# EAGLE board DS1077_breakout-Panel-v10 (EAGLE 6.5.0)
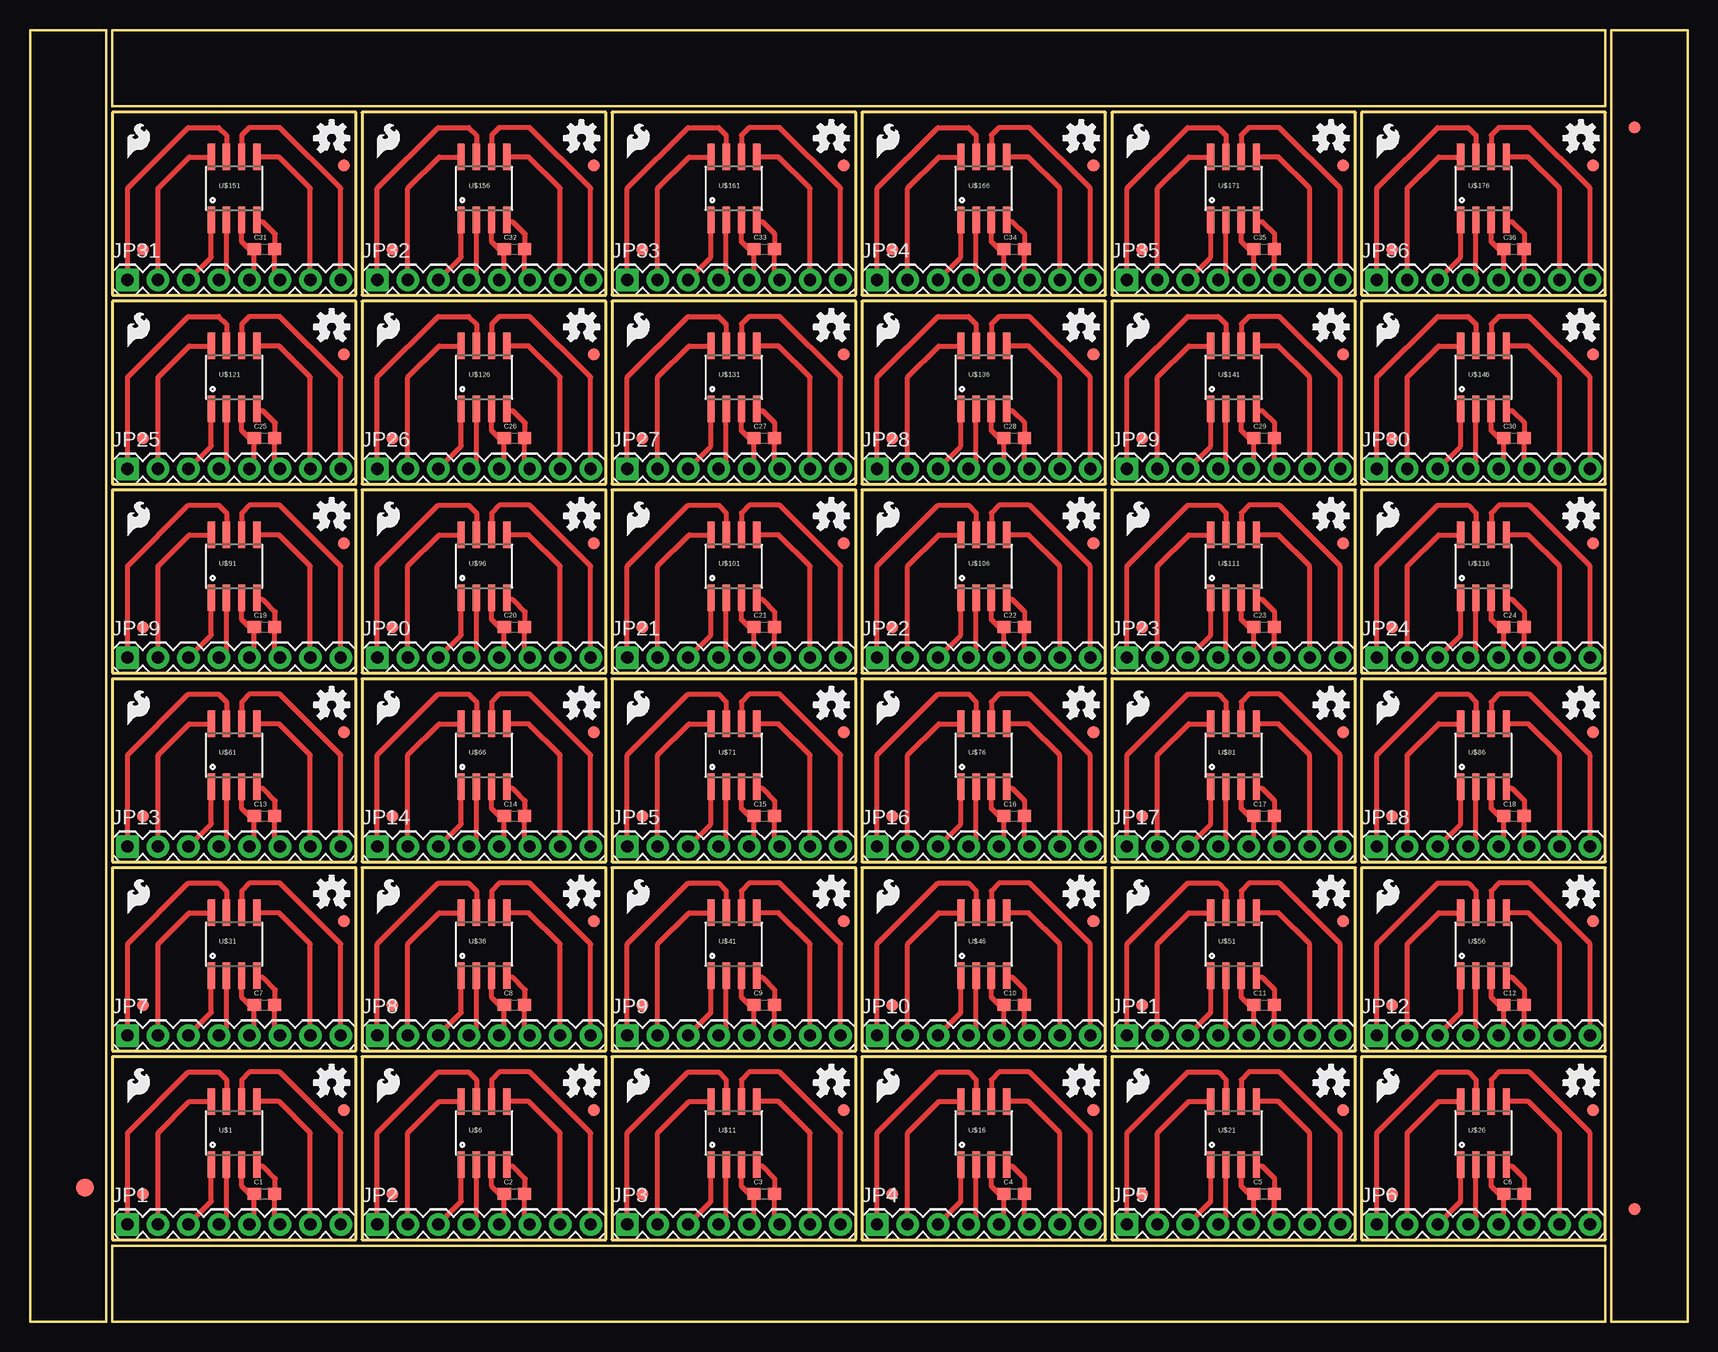
[diagram p0: board, top side]
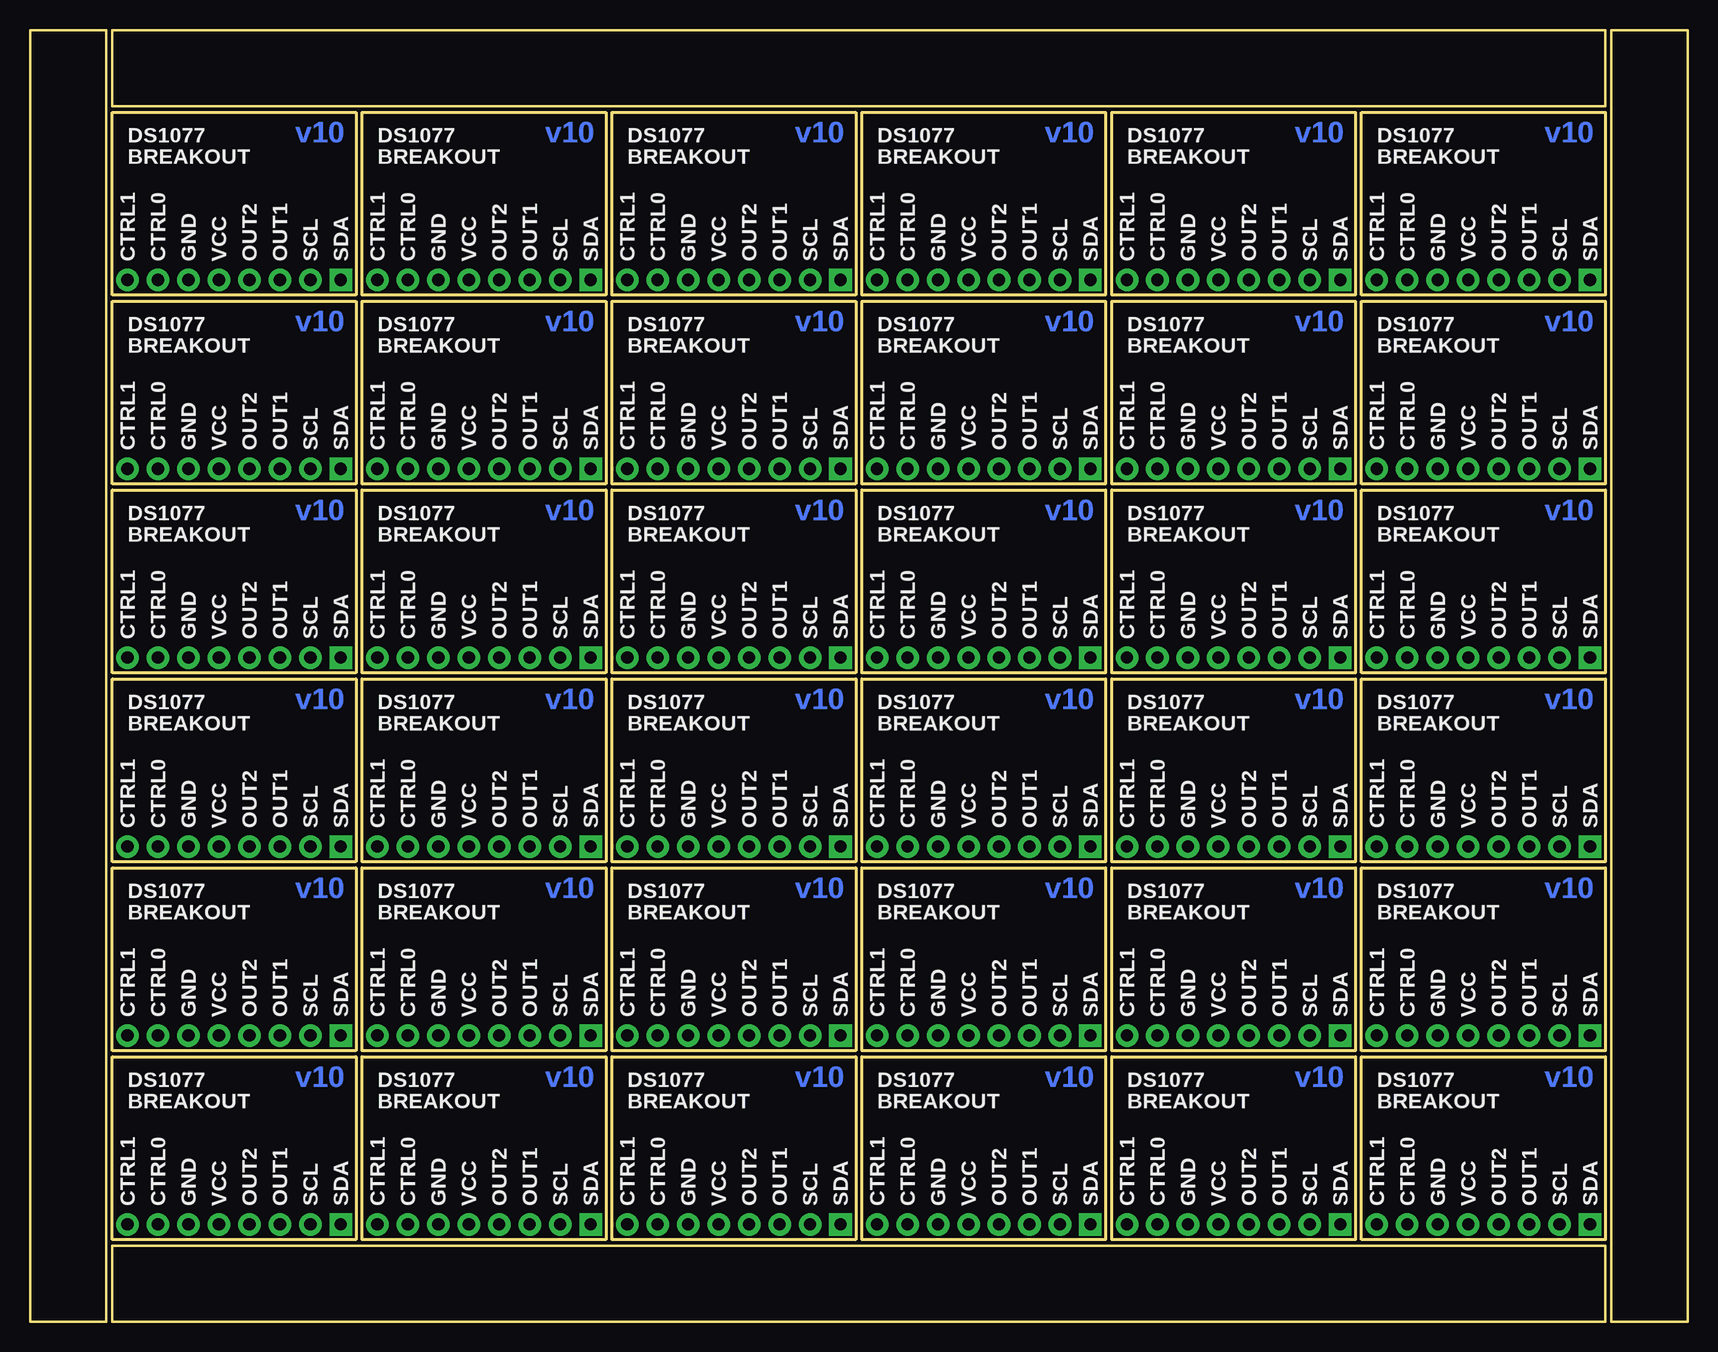
[diagram p1: board, bottom side, seen from below]

Size 138.18 x 107.7 mm. Coordinates in mm from the lower left corner, seen from the top.
Outline: 6.35,79.25 6.35,0 0,0 0,29.72
Outline: 138.18,79.25 138.18,0 131.83,0 131.83,29.72
Outline: 131.83,28.45 131.83,107.7 138.18,107.7 138.18,77.98
Outline: 0,28.45 0,107.7 6.35,107.7 6.35,77.98
Outline: 6.86,6.86 27.18,6.86 27.18,22.1 6.86,22.1 6.86,6.86
Outline: 27.69,6.86 48.01,6.86 48.01,22.1 27.69,22.1 27.69,6.86
Outline: 48.51,6.86 68.83,6.86 68.83,22.1 48.51,22.1 48.51,6.86
Outline: 69.34,6.86 89.66,6.86 89.66,22.1 69.34,22.1 69.34,6.86
Outline: 90.17,6.86 110.49,6.86 110.49,22.1 90.17,22.1 90.17,6.86
Outline: 111,6.86 131.32,6.86 131.32,22.1 111,22.1 111,6.86
Outline: 6.86,22.61 27.18,22.61 27.18,37.85 6.86,37.85 6.86,22.61
Outline: 27.69,22.61 48.01,22.61 48.01,37.85 27.69,37.85 27.69,22.61
Outline: 48.51,22.61 68.83,22.61 68.83,37.85 48.51,37.85 48.51,22.61
Outline: 69.34,22.61 89.66,22.61 89.66,37.85 69.34,37.85 69.34,22.61
Outline: 90.17,22.61 110.49,22.61 110.49,37.85 90.17,37.85 90.17,22.61
Outline: 111,22.61 131.32,22.61 131.32,37.85 111,37.85 111,22.61
Outline: 6.86,38.35 27.18,38.35 27.18,53.59 6.86,53.59 6.86,38.35
Outline: 27.69,38.35 48.01,38.35 48.01,53.59 27.69,53.59 27.69,38.35
Outline: 48.51,38.35 68.83,38.35 68.83,53.59 48.51,53.59 48.51,38.35
Outline: 69.34,38.35 89.66,38.35 89.66,53.59 69.34,53.59 69.34,38.35
Outline: 90.17,38.35 110.49,38.35 110.49,53.59 90.17,53.59 90.17,38.35
Outline: 111,38.35 131.32,38.35 131.32,53.59 111,53.59 111,38.35
Outline: 6.86,54.1 27.18,54.1 27.18,69.34 6.86,69.34 6.86,54.1
Outline: 27.69,54.1 48.01,54.1 48.01,69.34 27.69,69.34 27.69,54.1
Outline: 48.51,54.1 68.83,54.1 68.83,69.34 48.51,69.34 48.51,54.1
Outline: 69.34,54.1 89.66,54.1 89.66,69.34 69.34,69.34 69.34,54.1
Outline: 90.17,54.1 110.49,54.1 110.49,69.34 90.17,69.34 90.17,54.1
Outline: 111,54.1 131.32,54.1 131.32,69.34 111,69.34 111,54.1
Outline: 6.86,69.85 27.18,69.85 27.18,85.09 6.86,85.09 6.86,69.85
Outline: 27.69,69.85 48.01,69.85 48.01,85.09 27.69,85.09 27.69,69.85
Outline: 48.51,69.85 68.83,69.85 68.83,85.09 48.51,85.09 48.51,69.85
Outline: 69.34,69.85 89.66,69.85 89.66,85.09 69.34,85.09 69.34,69.85
Outline: 90.17,69.85 110.49,69.85 110.49,85.09 90.17,85.09 90.17,69.85
Outline: 111,69.85 131.32,69.85 131.32,85.09 111,85.09 111,69.85
Outline: 6.86,85.6 27.18,85.6 27.18,100.84 6.86,100.84 6.86,85.6
Outline: 27.69,85.6 48.01,85.6 48.01,100.84 27.69,100.84 27.69,85.6
Outline: 48.51,85.6 68.83,85.6 68.83,100.84 48.51,100.84 48.51,85.6
Outline: 69.34,85.6 89.66,85.6 89.66,100.84 69.34,100.84 69.34,85.6
Outline: 90.17,85.6 110.49,85.6 110.49,100.84 90.17,100.84 90.17,85.6
Outline: 111,85.6 131.32,85.6 131.32,100.84 111,100.84 111,85.6
Outline: 6.86,0 131.32,0 131.32,6.35 6.86,6.35 6.86,0
Outline: 131.32,107.7 6.86,107.7 6.86,101.35 131.32,101.35 131.32,107.7
Copper layers (1*16): Top 0.035mm / dielectric 1.5mm / Bottom 0.035mm
Design rules "SparkFun": minimum track width 8mil, minimum drill 20mil, track to track 8mil, track to pad 8mil, pad to pad 8mil, via to via 8mil, smd to smd 8mil, copper to edge 10mil, drill to drill 8mil, minimum pad ring 12mil, minimum via ring 10mil, stop-mask expansion 4mil, vias tented up to drill 25mil, thermal gap 10mil

## Footprints (pad centres in the part's own frame; a part is rotated, then mirrored left to right if it is on the bottom)
0603 = smd 1.1 x 1: 1 -0.85,0; 2 0.85,0
FIDUCIAL-1.5X3 = smd 1.5 x 1.5: 1 0,0
FIDUCIAL-1X2 = smd 1 x 1: 1 0,0
1X08 = drill 1.016 pad 1.88 square: 1 0,0 | drill 1.016 pad 1.88: 2 2.54,0; 3 5.08,0; 4 7.62,0; 5 10.16,0; 6 12.7,0; 7 15.24,0; 8 17.78,0
SO08 = smd 0.61 x 2.21: 1 -1.905,-2.616; 2 -0.635,-2.616; 3 0.635,-2.616; 4 1.905,-2.616; 5 1.905,2.616; 6 0.635,2.616; 7 -0.635,2.616; 8 -1.905,2.616

## Placement (x,y rotation side)
C1  .1uF  [0603]  19.56,10.67 0 top
C2  .1uF  [0603]  40.39,10.67 0 top
C3  .1uF  [0603]  61.21,10.67 0 top
C4  .1uF  [0603]  82.04,10.67 0 top
C5  .1uF  [0603]  102.87,10.67 0 top
C6  .1uF  [0603]  123.7,10.67 0 top
C7  .1uF  [0603]  19.56,26.42 0 top
C8  .1uF  [0603]  40.39,26.42 0 top
C9  .1uF  [0603]  61.21,26.42 0 top
C10  .1uF  [0603]  82.04,26.42 0 top
C11  .1uF  [0603]  102.87,26.42 0 top
C12  .1uF  [0603]  123.7,26.42 0 top
C13  .1uF  [0603]  19.56,42.16 0 top
C14  .1uF  [0603]  40.39,42.16 0 top
C15  .1uF  [0603]  61.21,42.16 0 top
C16  .1uF  [0603]  82.04,42.16 0 top
C17  .1uF  [0603]  102.87,42.16 0 top
C18  .1uF  [0603]  123.7,42.16 0 top
C19  .1uF  [0603]  19.56,57.91 0 top
C20  .1uF  [0603]  40.39,57.91 0 top
C21  .1uF  [0603]  61.21,57.91 0 top
C22  .1uF  [0603]  82.04,57.91 0 top
C23  .1uF  [0603]  102.87,57.91 0 top
C24  .1uF  [0603]  123.7,57.91 0 top
C25  .1uF  [0603]  19.56,73.66 0 top
C26  .1uF  [0603]  40.39,73.66 0 top
C27  .1uF  [0603]  61.21,73.66 0 top
C28  .1uF  [0603]  82.04,73.66 0 top
C29  .1uF  [0603]  102.87,73.66 0 top
C30  .1uF  [0603]  123.7,73.66 0 top
C31  .1uF  [0603]  19.56,89.41 0 top
C32  .1uF  [0603]  40.39,89.41 0 top
C33  .1uF  [0603]  61.21,89.41 0 top
C34  .1uF  [0603]  82.04,89.41 0 top
C35  .1uF  [0603]  102.87,89.41 0 top
C36  .1uF  [0603]  123.7,89.41 0 top
E$1  [FIDUCIAL-1.5X3]  4.57,11.18 0 top
E$4  [FIDUCIAL-1X2]  133.73,9.4 0 top
E$5  [FIDUCIAL-1X2]  133.73,99.57 180 top
JP1  [1X08]  8.13,8.13 0 top
JP2  [1X08]  28.96,8.13 0 top
JP3  [1X08]  49.78,8.13 0 top
JP4  [1X08]  70.61,8.13 0 top
JP5  [1X08]  91.44,8.13 0 top
JP6  [1X08]  112.27,8.13 0 top
JP7  [1X08]  8.13,23.88 0 top
JP8  [1X08]  28.96,23.88 0 top
JP9  [1X08]  49.78,23.88 0 top
JP10  [1X08]  70.61,23.88 0 top
JP11  [1X08]  91.44,23.88 0 top
JP12  [1X08]  112.27,23.88 0 top
JP13  [1X08]  8.13,39.62 0 top
JP14  [1X08]  28.96,39.62 0 top
JP15  [1X08]  49.78,39.62 0 top
JP16  [1X08]  70.61,39.62 0 top
JP17  [1X08]  91.44,39.62 0 top
JP18  [1X08]  112.27,39.62 0 top
JP19  [1X08]  8.13,55.37 0 top
JP20  [1X08]  28.96,55.37 0 top
JP21  [1X08]  49.78,55.37 0 top
JP22  [1X08]  70.61,55.37 0 top
JP23  [1X08]  91.44,55.37 0 top
JP24  [1X08]  112.27,55.37 0 top
JP25  [1X08]  8.13,71.12 0 top
JP26  [1X08]  28.96,71.12 0 top
JP27  [1X08]  49.78,71.12 0 top
JP28  [1X08]  70.61,71.12 0 top
JP29  [1X08]  91.44,71.12 0 top
JP30  [1X08]  112.27,71.12 0 top
JP31  [1X08]  8.13,86.87 0 top
JP32  [1X08]  28.96,86.87 0 top
JP33  [1X08]  49.78,86.87 0 top
JP34  [1X08]  70.61,86.87 0 top
JP35  [1X08]  91.44,86.87 0 top
JP36  [1X08]  112.27,86.87 0 top
U$1  DS1077  [SO08]  17.02,15.75 0 top
U$2  LOGO-SFESK  [SFE-LOGO-FLAME]  8.13,18.29 0 top
U$3  FIDUCIAL1X2  [FIDUCIAL-1X2]  26.16,17.65 0 top
U$4  FIDUCIAL1X2  [FIDUCIAL-1X2]  9.4,10.67 0 top
U$5  [OSHW-LOGO-S]  25.15,19.94 0 top
U$6  DS1077  [SO08]  37.85,15.75 0 top
U$7  LOGO-SFESK  [SFE-LOGO-FLAME]  28.96,18.29 0 top
U$8  FIDUCIAL1X2  [FIDUCIAL-1X2]  46.99,17.65 0 top
U$9  FIDUCIAL1X2  [FIDUCIAL-1X2]  30.23,10.67 0 top
U$10  [OSHW-LOGO-S]  45.97,19.94 0 top
U$11  DS1077  [SO08]  58.67,15.75 0 top
U$12  LOGO-SFESK  [SFE-LOGO-FLAME]  49.78,18.29 0 top
U$13  FIDUCIAL1X2  [FIDUCIAL-1X2]  67.82,17.65 0 top
U$14  FIDUCIAL1X2  [FIDUCIAL-1X2]  51.05,10.67 0 top
U$15  [OSHW-LOGO-S]  66.8,19.94 0 top
U$16  DS1077  [SO08]  79.5,15.75 0 top
U$17  LOGO-SFESK  [SFE-LOGO-FLAME]  70.61,18.29 0 top
U$18  FIDUCIAL1X2  [FIDUCIAL-1X2]  88.65,17.65 0 top
U$19  FIDUCIAL1X2  [FIDUCIAL-1X2]  71.88,10.67 0 top
U$20  [OSHW-LOGO-S]  87.63,19.94 0 top
U$21  DS1077  [SO08]  100.33,15.75 0 top
U$22  LOGO-SFESK  [SFE-LOGO-FLAME]  91.44,18.29 0 top
U$23  FIDUCIAL1X2  [FIDUCIAL-1X2]  109.47,17.65 0 top
U$24  FIDUCIAL1X2  [FIDUCIAL-1X2]  92.71,10.67 0 top
U$25  [OSHW-LOGO-S]  108.46,19.94 0 top
U$26  DS1077  [SO08]  121.16,15.75 0 top
U$27  LOGO-SFESK  [SFE-LOGO-FLAME]  112.27,18.29 0 top
U$28  FIDUCIAL1X2  [FIDUCIAL-1X2]  130.3,17.65 0 top
U$29  FIDUCIAL1X2  [FIDUCIAL-1X2]  113.54,10.67 0 top
U$30  [OSHW-LOGO-S]  129.29,19.94 0 top
U$31  DS1077  [SO08]  17.02,31.5 0 top
U$32  LOGO-SFESK  [SFE-LOGO-FLAME]  8.13,34.04 0 top
U$33  FIDUCIAL1X2  [FIDUCIAL-1X2]  26.16,33.4 0 top
U$34  FIDUCIAL1X2  [FIDUCIAL-1X2]  9.4,26.42 0 top
U$35  [OSHW-LOGO-S]  25.15,35.69 0 top
U$36  DS1077  [SO08]  37.85,31.5 0 top
U$37  LOGO-SFESK  [SFE-LOGO-FLAME]  28.96,34.04 0 top
U$38  FIDUCIAL1X2  [FIDUCIAL-1X2]  46.99,33.4 0 top
U$39  FIDUCIAL1X2  [FIDUCIAL-1X2]  30.23,26.42 0 top
U$40  [OSHW-LOGO-S]  45.97,35.69 0 top
U$41  DS1077  [SO08]  58.67,31.5 0 top
U$42  LOGO-SFESK  [SFE-LOGO-FLAME]  49.78,34.04 0 top
U$43  FIDUCIAL1X2  [FIDUCIAL-1X2]  67.82,33.4 0 top
U$44  FIDUCIAL1X2  [FIDUCIAL-1X2]  51.05,26.42 0 top
U$45  [OSHW-LOGO-S]  66.8,35.69 0 top
U$46  DS1077  [SO08]  79.5,31.5 0 top
U$47  LOGO-SFESK  [SFE-LOGO-FLAME]  70.61,34.04 0 top
U$48  FIDUCIAL1X2  [FIDUCIAL-1X2]  88.65,33.4 0 top
U$49  FIDUCIAL1X2  [FIDUCIAL-1X2]  71.88,26.42 0 top
U$50  [OSHW-LOGO-S]  87.63,35.69 0 top
U$51  DS1077  [SO08]  100.33,31.5 0 top
U$52  LOGO-SFESK  [SFE-LOGO-FLAME]  91.44,34.04 0 top
U$53  FIDUCIAL1X2  [FIDUCIAL-1X2]  109.47,33.4 0 top
U$54  FIDUCIAL1X2  [FIDUCIAL-1X2]  92.71,26.42 0 top
U$55  [OSHW-LOGO-S]  108.46,35.69 0 top
U$56  DS1077  [SO08]  121.16,31.5 0 top
U$57  LOGO-SFESK  [SFE-LOGO-FLAME]  112.27,34.04 0 top
U$58  FIDUCIAL1X2  [FIDUCIAL-1X2]  130.3,33.4 0 top
U$59  FIDUCIAL1X2  [FIDUCIAL-1X2]  113.54,26.42 0 top
U$60  [OSHW-LOGO-S]  129.29,35.69 0 top
U$61  DS1077  [SO08]  17.02,47.24 0 top
U$62  LOGO-SFESK  [SFE-LOGO-FLAME]  8.13,49.78 0 top
U$63  FIDUCIAL1X2  [FIDUCIAL-1X2]  26.16,49.15 0 top
U$64  FIDUCIAL1X2  [FIDUCIAL-1X2]  9.4,42.16 0 top
U$65  [OSHW-LOGO-S]  25.15,51.44 0 top
U$66  DS1077  [SO08]  37.85,47.24 0 top
U$67  LOGO-SFESK  [SFE-LOGO-FLAME]  28.96,49.78 0 top
U$68  FIDUCIAL1X2  [FIDUCIAL-1X2]  46.99,49.15 0 top
U$69  FIDUCIAL1X2  [FIDUCIAL-1X2]  30.23,42.16 0 top
U$70  [OSHW-LOGO-S]  45.97,51.44 0 top
U$71  DS1077  [SO08]  58.67,47.24 0 top
U$72  LOGO-SFESK  [SFE-LOGO-FLAME]  49.78,49.78 0 top
U$73  FIDUCIAL1X2  [FIDUCIAL-1X2]  67.82,49.15 0 top
U$74  FIDUCIAL1X2  [FIDUCIAL-1X2]  51.05,42.16 0 top
U$75  [OSHW-LOGO-S]  66.8,51.44 0 top
U$76  DS1077  [SO08]  79.5,47.24 0 top
U$77  LOGO-SFESK  [SFE-LOGO-FLAME]  70.61,49.78 0 top
U$78  FIDUCIAL1X2  [FIDUCIAL-1X2]  88.65,49.15 0 top
U$79  FIDUCIAL1X2  [FIDUCIAL-1X2]  71.88,42.16 0 top
U$80  [OSHW-LOGO-S]  87.63,51.44 0 top
U$81  DS1077  [SO08]  100.33,47.24 0 top
U$82  LOGO-SFESK  [SFE-LOGO-FLAME]  91.44,49.78 0 top
U$83  FIDUCIAL1X2  [FIDUCIAL-1X2]  109.47,49.15 0 top
U$84  FIDUCIAL1X2  [FIDUCIAL-1X2]  92.71,42.16 0 top
U$85  [OSHW-LOGO-S]  108.46,51.44 0 top
U$86  DS1077  [SO08]  121.16,47.24 0 top
U$87  LOGO-SFESK  [SFE-LOGO-FLAME]  112.27,49.78 0 top
U$88  FIDUCIAL1X2  [FIDUCIAL-1X2]  130.3,49.15 0 top
U$89  FIDUCIAL1X2  [FIDUCIAL-1X2]  113.54,42.16 0 top
U$90  [OSHW-LOGO-S]  129.29,51.44 0 top
U$91  DS1077  [SO08]  17.02,62.99 0 top
U$92  LOGO-SFESK  [SFE-LOGO-FLAME]  8.13,65.53 0 top
U$93  FIDUCIAL1X2  [FIDUCIAL-1X2]  26.16,64.9 0 top
U$94  FIDUCIAL1X2  [FIDUCIAL-1X2]  9.4,57.91 0 top
U$95  [OSHW-LOGO-S]  25.15,67.18 0 top
U$96  DS1077  [SO08]  37.85,62.99 0 top
U$97  LOGO-SFESK  [SFE-LOGO-FLAME]  28.96,65.53 0 top
U$98  FIDUCIAL1X2  [FIDUCIAL-1X2]  46.99,64.9 0 top
U$99  FIDUCIAL1X2  [FIDUCIAL-1X2]  30.23,57.91 0 top
U$100  [OSHW-LOGO-S]  45.97,67.18 0 top
U$101  DS1077  [SO08]  58.67,62.99 0 top
U$102  LOGO-SFESK  [SFE-LOGO-FLAME]  49.78,65.53 0 top
U$103  FIDUCIAL1X2  [FIDUCIAL-1X2]  67.82,64.9 0 top
U$104  FIDUCIAL1X2  [FIDUCIAL-1X2]  51.05,57.91 0 top
U$105  [OSHW-LOGO-S]  66.8,67.18 0 top
U$106  DS1077  [SO08]  79.5,62.99 0 top
U$107  LOGO-SFESK  [SFE-LOGO-FLAME]  70.61,65.53 0 top
U$108  FIDUCIAL1X2  [FIDUCIAL-1X2]  88.65,64.9 0 top
U$109  FIDUCIAL1X2  [FIDUCIAL-1X2]  71.88,57.91 0 top
U$110  [OSHW-LOGO-S]  87.63,67.18 0 top
U$111  DS1077  [SO08]  100.33,62.99 0 top
U$112  LOGO-SFESK  [SFE-LOGO-FLAME]  91.44,65.53 0 top
U$113  FIDUCIAL1X2  [FIDUCIAL-1X2]  109.47,64.9 0 top
U$114  FIDUCIAL1X2  [FIDUCIAL-1X2]  92.71,57.91 0 top
U$115  [OSHW-LOGO-S]  108.46,67.18 0 top
U$116  DS1077  [SO08]  121.16,62.99 0 top
U$117  LOGO-SFESK  [SFE-LOGO-FLAME]  112.27,65.53 0 top
U$118  FIDUCIAL1X2  [FIDUCIAL-1X2]  130.3,64.9 0 top
U$119  FIDUCIAL1X2  [FIDUCIAL-1X2]  113.54,57.91 0 top
U$120  [OSHW-LOGO-S]  129.29,67.18 0 top
U$121  DS1077  [SO08]  17.02,78.74 0 top
U$122  LOGO-SFESK  [SFE-LOGO-FLAME]  8.13,81.28 0 top
U$123  FIDUCIAL1X2  [FIDUCIAL-1X2]  26.16,80.64 0 top
U$124  FIDUCIAL1X2  [FIDUCIAL-1X2]  9.4,73.66 0 top
U$125  [OSHW-LOGO-S]  25.15,82.93 0 top
U$126  DS1077  [SO08]  37.85,78.74 0 top
U$127  LOGO-SFESK  [SFE-LOGO-FLAME]  28.96,81.28 0 top
U$128  FIDUCIAL1X2  [FIDUCIAL-1X2]  46.99,80.64 0 top
U$129  FIDUCIAL1X2  [FIDUCIAL-1X2]  30.23,73.66 0 top
U$130  [OSHW-LOGO-S]  45.97,82.93 0 top
U$131  DS1077  [SO08]  58.67,78.74 0 top
U$132  LOGO-SFESK  [SFE-LOGO-FLAME]  49.78,81.28 0 top
U$133  FIDUCIAL1X2  [FIDUCIAL-1X2]  67.82,80.64 0 top
U$134  FIDUCIAL1X2  [FIDUCIAL-1X2]  51.05,73.66 0 top
U$135  [OSHW-LOGO-S]  66.8,82.93 0 top
U$136  DS1077  [SO08]  79.5,78.74 0 top
U$137  LOGO-SFESK  [SFE-LOGO-FLAME]  70.61,81.28 0 top
U$138  FIDUCIAL1X2  [FIDUCIAL-1X2]  88.65,80.64 0 top
U$139  FIDUCIAL1X2  [FIDUCIAL-1X2]  71.88,73.66 0 top
U$140  [OSHW-LOGO-S]  87.63,82.93 0 top
U$141  DS1077  [SO08]  100.33,78.74 0 top
U$142  LOGO-SFESK  [SFE-LOGO-FLAME]  91.44,81.28 0 top
U$143  FIDUCIAL1X2  [FIDUCIAL-1X2]  109.47,80.64 0 top
U$144  FIDUCIAL1X2  [FIDUCIAL-1X2]  92.71,73.66 0 top
U$145  [OSHW-LOGO-S]  108.46,82.93 0 top
U$146  DS1077  [SO08]  121.16,78.74 0 top
U$147  LOGO-SFESK  [SFE-LOGO-FLAME]  112.27,81.28 0 top
U$148  FIDUCIAL1X2  [FIDUCIAL-1X2]  130.3,80.64 0 top
U$149  FIDUCIAL1X2  [FIDUCIAL-1X2]  113.54,73.66 0 top
U$150  [OSHW-LOGO-S]  129.29,82.93 0 top
U$151  DS1077  [SO08]  17.02,94.49 0 top
U$152  LOGO-SFESK  [SFE-LOGO-FLAME]  8.13,97.03 0 top
U$153  FIDUCIAL1X2  [FIDUCIAL-1X2]  26.16,96.39 0 top
U$154  FIDUCIAL1X2  [FIDUCIAL-1X2]  9.4,89.41 0 top
U$155  [OSHW-LOGO-S]  25.15,98.68 0 top
U$156  DS1077  [SO08]  37.85,94.49 0 top
U$157  LOGO-SFESK  [SFE-LOGO-FLAME]  28.96,97.03 0 top
U$158  FIDUCIAL1X2  [FIDUCIAL-1X2]  46.99,96.39 0 top
U$159  FIDUCIAL1X2  [FIDUCIAL-1X2]  30.23,89.41 0 top
U$160  [OSHW-LOGO-S]  45.97,98.68 0 top
U$161  DS1077  [SO08]  58.67,94.49 0 top
U$162  LOGO-SFESK  [SFE-LOGO-FLAME]  49.78,97.03 0 top
U$163  FIDUCIAL1X2  [FIDUCIAL-1X2]  67.82,96.39 0 top
U$164  FIDUCIAL1X2  [FIDUCIAL-1X2]  51.05,89.41 0 top
U$165  [OSHW-LOGO-S]  66.8,98.68 0 top
U$166  DS1077  [SO08]  79.5,94.49 0 top
U$167  LOGO-SFESK  [SFE-LOGO-FLAME]  70.61,97.03 0 top
U$168  FIDUCIAL1X2  [FIDUCIAL-1X2]  88.65,96.39 0 top
U$169  FIDUCIAL1X2  [FIDUCIAL-1X2]  71.88,89.41 0 top
U$170  [OSHW-LOGO-S]  87.63,98.68 0 top
U$171  DS1077  [SO08]  100.33,94.49 0 top
U$172  LOGO-SFESK  [SFE-LOGO-FLAME]  91.44,97.03 0 top
U$173  FIDUCIAL1X2  [FIDUCIAL-1X2]  109.47,96.39 0 top
U$174  FIDUCIAL1X2  [FIDUCIAL-1X2]  92.71,89.41 0 top
U$175  [OSHW-LOGO-S]  108.46,98.68 0 top
U$176  DS1077  [SO08]  121.16,94.49 0 top
U$177  LOGO-SFESK  [SFE-LOGO-FLAME]  112.27,97.03 0 top
U$178  FIDUCIAL1X2  [FIDUCIAL-1X2]  130.3,96.39 0 top
U$179  FIDUCIAL1X2  [FIDUCIAL-1X2]  113.54,89.41 0 top
U$180  [OSHW-LOGO-S]  129.29,98.68 0 top

## Library data of the parts
C1-C36 U$1-U$4 U$6-U$9 U$11-U$14 U$16-U$19 U$21-U$24 U$26-U$29 U$31-U$34 U$36-U$39 U$41-U$44 U$46-U$49 U$51-U$54 U$56-U$59 U$61-U$64 U$66-U$69 U$71-U$74 U$76-U$79 U$81-U$84 U$86-U$89 U$91-U$94 U$96-U$99 U$101-U$104 U$106-U$109 U$111-U$114 U$116-U$119 U$121-U$124 U$126-U$129 U$131-U$134 U$136-U$139 U$141-U$144 U$146-U$149 U$151-U$154 U$156-U$159 U$161-U$164 U$166-U$169 U$171-U$174 U$176-U$179 = SparkFun
E$1 E$4 E$5 U$5 U$10 U$15 U$20 U$25 U$30 U$35 U$40 U$45 U$50 U$55 U$60 U$65 U$70 U$75 U$80 U$85 U$90 U$95 U$100 U$105 U$110 U$115 U$120 U$125 U$130 U$135 U$140 U$145 U$150 U$155 U$160 U$165 U$170 U$175 U$180 = SparkFun-Aesthetics
JP1-JP36 = SparkFun-Connectors

## Nets
CTRL0: JP1.7 U$1.5
CTRL1: JP1.8 U$1.6
CTRL2: JP2.7 U$6.5
CTRL3: JP2.8 U$6.6
CTRL4: JP3.7 U$11.5
CTRL5: JP3.8 U$11.6
CTRL6: JP4.7 U$16.5
CTRL7: JP4.8 U$16.6
CTRL8: JP5.7 U$21.5
CTRL9: JP5.8 U$21.6
CTRL10: JP6.7 U$26.5
CTRL11: JP6.8 U$26.6
CTRL12: JP7.7 U$31.5
CTRL13: JP7.8 U$31.6
CTRL14: JP8.7 U$36.5
CTRL15: JP8.8 U$36.6
CTRL16: JP9.7 U$41.5
CTRL17: JP9.8 U$41.6
CTRL18: JP10.7 U$46.5
CTRL19: JP10.8 U$46.6
CTRL20: JP11.7 U$51.5
CTRL21: JP11.8 U$51.6
CTRL22: JP12.7 U$56.5
CTRL23: JP12.8 U$56.6
CTRL24: JP13.7 U$61.5
CTRL25: JP13.8 U$61.6
CTRL26: JP14.7 U$66.5
CTRL27: JP14.8 U$66.6
CTRL28: JP15.7 U$71.5
CTRL29: JP15.8 U$71.6
CTRL30: JP16.7 U$76.5
CTRL31: JP16.8 U$76.6
CTRL32: JP17.7 U$81.5
CTRL33: JP17.8 U$81.6
CTRL34: JP18.7 U$86.5
CTRL35: JP18.8 U$86.6
CTRL36: JP19.7 U$91.5
CTRL37: JP19.8 U$91.6
CTRL38: JP20.7 U$96.5
CTRL39: JP20.8 U$96.6
CTRL40: JP21.7 U$101.5
CTRL41: JP21.8 U$101.6
CTRL42: JP22.7 U$106.5
CTRL43: JP22.8 U$106.6
CTRL44: JP23.7 U$111.5
CTRL45: JP23.8 U$111.6
CTRL46: JP24.7 U$116.5
CTRL47: JP24.8 U$116.6
CTRL48: JP25.7 U$121.5
CTRL49: JP25.8 U$121.6
CTRL50: JP26.7 U$126.5
CTRL51: JP26.8 U$126.6
CTRL52: JP27.7 U$131.5
CTRL53: JP27.8 U$131.6
CTRL54: JP28.7 U$136.5
CTRL55: JP28.8 U$136.6
CTRL56: JP29.7 U$141.5
CTRL57: JP29.8 U$141.6
CTRL58: JP30.7 U$146.5
CTRL59: JP30.8 U$146.6
CTRL60: JP31.7 U$151.5
CTRL61: JP31.8 U$151.6
CTRL62: JP32.7 U$156.5
CTRL63: JP32.8 U$156.6
CTRL64: JP33.7 U$161.5
CTRL65: JP33.8 U$161.6
CTRL66: JP34.7 U$166.5
CTRL67: JP34.8 U$166.6
CTRL68: JP35.7 U$171.5
CTRL69: JP35.8 U$171.6
CTRL70: JP36.7 U$176.5
CTRL71: JP36.8 U$176.6
GND: C1.2 JP1.6 U$1.4
GND1: C2.2 JP2.6 U$6.4
GND2: C3.2 JP3.6 U$11.4
GND3: C4.2 JP4.6 U$16.4
GND4: C5.2 JP5.6 U$21.4
GND5: C6.2 JP6.6 U$26.4
GND6: C7.2 JP7.6 U$31.4
GND7: C8.2 JP8.6 U$36.4
GND8: C9.2 JP9.6 U$41.4
GND9: C10.2 JP10.6 U$46.4
GND10: C11.2 JP11.6 U$51.4
GND11: C12.2 JP12.6 U$56.4
GND12: C13.2 JP13.6 U$61.4
GND13: C14.2 JP14.6 U$66.4
GND14: C15.2 JP15.6 U$71.4
GND15: C16.2 JP16.6 U$76.4
GND16: C17.2 JP17.6 U$81.4
GND17: C18.2 JP18.6 U$86.4
GND18: C19.2 JP19.6 U$91.4
GND19: C20.2 JP20.6 U$96.4
GND20: C21.2 JP21.6 U$101.4
GND21: C22.2 JP22.6 U$106.4
GND22: C23.2 JP23.6 U$111.4
GND23: C24.2 JP24.6 U$116.4
GND24: C25.2 JP25.6 U$121.4
GND25: C26.2 JP26.6 U$126.4
GND26: C27.2 JP27.6 U$131.4
GND27: C28.2 JP28.6 U$136.4
GND28: C29.2 JP29.6 U$141.4
GND29: C30.2 JP30.6 U$146.4
GND30: C31.2 JP31.6 U$151.4
GND31: C32.2 JP32.6 U$156.4
GND32: C33.2 JP33.6 U$161.4
GND33: C34.2 JP34.6 U$166.4
GND34: C35.2 JP35.6 U$171.4
GND35: C36.2 JP36.6 U$176.4
OUT1: JP1.3 U$1.1
OUT2: JP1.4 U$1.2
OUT3: JP2.3 U$6.1
OUT4: JP2.4 U$6.2
OUT5: JP3.3 U$11.1
OUT6: JP3.4 U$11.2
OUT7: JP4.3 U$16.1
OUT8: JP4.4 U$16.2
OUT9: JP5.3 U$21.1
OUT10: JP5.4 U$21.2
OUT11: JP6.3 U$26.1
OUT12: JP6.4 U$26.2
OUT13: JP7.3 U$31.1
OUT14: JP7.4 U$31.2
OUT15: JP8.3 U$36.1
OUT16: JP8.4 U$36.2
OUT17: JP9.3 U$41.1
OUT18: JP9.4 U$41.2
OUT19: JP10.3 U$46.1
OUT20: JP10.4 U$46.2
OUT21: JP11.3 U$51.1
OUT22: JP11.4 U$51.2
OUT23: JP12.3 U$56.1
OUT24: JP12.4 U$56.2
OUT25: JP13.3 U$61.1
OUT26: JP13.4 U$61.2
OUT27: JP14.3 U$66.1
OUT28: JP14.4 U$66.2
OUT29: JP15.3 U$71.1
OUT30: JP15.4 U$71.2
OUT31: JP16.3 U$76.1
OUT32: JP16.4 U$76.2
OUT33: JP17.3 U$81.1
OUT34: JP17.4 U$81.2
OUT35: JP18.3 U$86.1
OUT36: JP18.4 U$86.2
OUT37: JP19.3 U$91.1
OUT38: JP19.4 U$91.2
OUT39: JP20.3 U$96.1
OUT40: JP20.4 U$96.2
OUT41: JP21.3 U$101.1
OUT42: JP21.4 U$101.2
OUT43: JP22.3 U$106.1
OUT44: JP22.4 U$106.2
OUT45: JP23.3 U$111.1
OUT46: JP23.4 U$111.2
OUT47: JP24.3 U$116.1
OUT48: JP24.4 U$116.2
OUT49: JP25.3 U$121.1
OUT50: JP25.4 U$121.2
OUT51: JP26.3 U$126.1
OUT52: JP26.4 U$126.2
OUT53: JP27.3 U$131.1
OUT54: JP27.4 U$131.2
OUT55: JP28.3 U$136.1
OUT56: JP28.4 U$136.2
OUT57: JP29.3 U$141.1
OUT58: JP29.4 U$141.2
OUT59: JP30.3 U$146.1
OUT60: JP30.4 U$146.2
OUT61: JP31.3 U$151.1
OUT62: JP31.4 U$151.2
OUT63: JP32.3 U$156.1
OUT64: JP32.4 U$156.2
OUT65: JP33.3 U$161.1
OUT66: JP33.4 U$161.2
OUT67: JP34.3 U$166.1
OUT68: JP34.4 U$166.2
OUT69: JP35.3 U$171.1
OUT70: JP35.4 U$171.2
OUT71: JP36.3 U$176.1
OUT72: JP36.4 U$176.2
SCL: JP1.2 U$1.8
SCL1: JP2.2 U$6.8
SCL2: JP3.2 U$11.8
SCL3: JP4.2 U$16.8
SCL4: JP5.2 U$21.8
SCL5: JP6.2 U$26.8
SCL6: JP7.2 U$31.8
SCL7: JP8.2 U$36.8
SCL8: JP9.2 U$41.8
SCL9: JP10.2 U$46.8
SCL10: JP11.2 U$51.8
SCL11: JP12.2 U$56.8
SCL12: JP13.2 U$61.8
SCL13: JP14.2 U$66.8
SCL14: JP15.2 U$71.8
SCL15: JP16.2 U$76.8
SCL16: JP17.2 U$81.8
SCL17: JP18.2 U$86.8
SCL18: JP19.2 U$91.8
SCL19: JP20.2 U$96.8
SCL20: JP21.2 U$101.8
SCL21: JP22.2 U$106.8
SCL22: JP23.2 U$111.8
SCL23: JP24.2 U$116.8
SCL24: JP25.2 U$121.8
SCL25: JP26.2 U$126.8
SCL26: JP27.2 U$131.8
SCL27: JP28.2 U$136.8
SCL28: JP29.2 U$141.8
SCL29: JP30.2 U$146.8
SCL30: JP31.2 U$151.8
SCL31: JP32.2 U$156.8
SCL32: JP33.2 U$161.8
SCL33: JP34.2 U$166.8
SCL34: JP35.2 U$171.8
SCL35: JP36.2 U$176.8
SDA: JP1.1 U$1.7
SDA1: JP2.1 U$6.7
SDA2: JP3.1 U$11.7
SDA3: JP4.1 U$16.7
SDA4: JP5.1 U$21.7
SDA5: JP6.1 U$26.7
SDA6: JP7.1 U$31.7
SDA7: JP8.1 U$36.7
SDA8: JP9.1 U$41.7
SDA9: JP10.1 U$46.7
SDA10: JP11.1 U$51.7
SDA11: JP12.1 U$56.7
SDA12: JP13.1 U$61.7
SDA13: JP14.1 U$66.7
SDA14: JP15.1 U$71.7
SDA15: JP16.1 U$76.7
SDA16: JP17.1 U$81.7
SDA17: JP18.1 U$86.7
SDA18: JP19.1 U$91.7
SDA19: JP20.1 U$96.7
SDA20: JP21.1 U$101.7
SDA21: JP22.1 U$106.7
SDA22: JP23.1 U$111.7
SDA23: JP24.1 U$116.7
SDA24: JP25.1 U$121.7
SDA25: JP26.1 U$126.7
SDA26: JP27.1 U$131.7
SDA27: JP28.1 U$136.7
SDA28: JP29.1 U$141.7
SDA29: JP30.1 U$146.7
SDA30: JP31.1 U$151.7
SDA31: JP32.1 U$156.7
SDA32: JP33.1 U$161.7
SDA33: JP34.1 U$166.7
SDA34: JP35.1 U$171.7
SDA35: JP36.1 U$176.7
VCC: C1.1 JP1.5 U$1.3
VCC1: C2.1 JP2.5 U$6.3
VCC2: C3.1 JP3.5 U$11.3
VCC3: C4.1 JP4.5 U$16.3
VCC4: C5.1 JP5.5 U$21.3
VCC5: C6.1 JP6.5 U$26.3
VCC6: C7.1 JP7.5 U$31.3
VCC7: C8.1 JP8.5 U$36.3
VCC8: C9.1 JP9.5 U$41.3
VCC9: C10.1 JP10.5 U$46.3
VCC10: C11.1 JP11.5 U$51.3
VCC11: C12.1 JP12.5 U$56.3
VCC12: C13.1 JP13.5 U$61.3
VCC13: C14.1 JP14.5 U$66.3
VCC14: C15.1 JP15.5 U$71.3
VCC15: C16.1 JP16.5 U$76.3
VCC16: C17.1 JP17.5 U$81.3
VCC17: C18.1 JP18.5 U$86.3
VCC18: C19.1 JP19.5 U$91.3
VCC19: C20.1 JP20.5 U$96.3
VCC20: C21.1 JP21.5 U$101.3
VCC21: C22.1 JP22.5 U$106.3
VCC22: C23.1 JP23.5 U$111.3
VCC23: C24.1 JP24.5 U$116.3
VCC24: C25.1 JP25.5 U$121.3
VCC25: C26.1 JP26.5 U$126.3
VCC26: C27.1 JP27.5 U$131.3
VCC27: C28.1 JP28.5 U$136.3
VCC28: C29.1 JP29.5 U$141.3
VCC29: C30.1 JP30.5 U$146.3
VCC30: C31.1 JP31.5 U$151.3
VCC31: C32.1 JP32.5 U$156.3
VCC32: C33.1 JP33.5 U$161.3
VCC33: C34.1 JP34.5 U$166.3
VCC34: C35.1 JP35.5 U$171.3
VCC35: C36.1 JP36.5 U$176.3

## Tracks (layer width: path | path; a pad name or v marks a point on that pad's centre or on a via)
CTRL0
  Top 0.406: U$1.5 20.75,18.36 23.37,15.75 JP1.7
CTRL1
  Top 0.406: U$1.6 17.65,20.19 18.29,20.83 20.83,20.83 25.91,15.75 JP1.8
CTRL2
  Top 0.406: U$6.5 41.58,18.36 44.2,15.75 JP2.7
CTRL3
  Top 0.406: U$6.6 38.48,20.19 39.12,20.83 41.66,20.83 46.74,15.75 JP2.8
CTRL4
  Top 0.406: U$11.5 62.41,18.36 65.02,15.75 JP3.7
CTRL5
  Top 0.406: U$11.6 59.31,20.19 59.94,20.83 62.48,20.83 67.56,15.75 JP3.8
CTRL6
  Top 0.406: U$16.5 83.24,18.36 85.85,15.75 JP4.7
CTRL7
  Top 0.406: U$16.6 80.14,20.19 80.77,20.83 83.31,20.83 88.39,15.75 JP4.8
CTRL8
  Top 0.406: U$21.5 104.06,18.36 106.68,15.75 JP5.7
CTRL9
  Top 0.406: U$21.6 100.97,20.19 101.6,20.83 104.14,20.83 109.22,15.75 JP5.8
CTRL10
  Top 0.406: U$26.5 124.89,18.36 127.51,15.75 JP6.7
CTRL11
  Top 0.406: U$26.6 121.79,20.19 122.43,20.83 124.97,20.83 130.05,15.75 JP6.8
CTRL12
  Top 0.406: U$31.5 20.75,34.11 23.37,31.5 JP7.7
CTRL13
  Top 0.406: U$31.6 17.65,35.94 18.29,36.58 20.83,36.58 25.91,31.5 JP7.8
CTRL14
  Top 0.406: U$36.5 41.58,34.11 44.2,31.5 JP8.7
CTRL15
  Top 0.406: U$36.6 38.48,35.94 39.12,36.58 41.66,36.58 46.74,31.5 JP8.8
CTRL16
  Top 0.406: U$41.5 62.41,34.11 65.02,31.5 JP9.7
CTRL17
  Top 0.406: U$41.6 59.31,35.94 59.94,36.58 62.48,36.58 67.56,31.5 JP9.8
CTRL18
  Top 0.406: U$46.5 83.24,34.11 85.85,31.5 JP10.7
CTRL19
  Top 0.406: U$46.6 80.14,35.94 80.77,36.58 83.31,36.58 88.39,31.5 JP10.8
CTRL20
  Top 0.406: U$51.5 104.06,34.11 106.68,31.5 JP11.7
CTRL21
  Top 0.406: U$51.6 100.97,35.94 101.6,36.58 104.14,36.58 109.22,31.5 JP11.8
CTRL22
  Top 0.406: U$56.5 124.89,34.11 127.51,31.5 JP12.7
CTRL23
  Top 0.406: U$56.6 121.79,35.94 122.43,36.58 124.97,36.58 130.05,31.5 JP12.8
CTRL24
  Top 0.406: U$61.5 20.75,49.86 23.37,47.24 JP13.7
CTRL25
  Top 0.406: U$61.6 17.65,51.69 18.29,52.32 20.83,52.32 25.91,47.24 JP13.8
CTRL26
  Top 0.406: U$66.5 41.58,49.86 44.2,47.24 JP14.7
CTRL27
  Top 0.406: U$66.6 38.48,51.69 39.12,52.32 41.66,52.32 46.74,47.24 JP14.8
CTRL28
  Top 0.406: U$71.5 62.41,49.86 65.02,47.24 JP15.7
CTRL29
  Top 0.406: U$71.6 59.31,51.69 59.94,52.32 62.48,52.32 67.56,47.24 JP15.8
CTRL30
  Top 0.406: U$76.5 83.24,49.86 85.85,47.24 JP16.7
CTRL31
  Top 0.406: U$76.6 80.14,51.69 80.77,52.32 83.31,52.32 88.39,47.24 JP16.8
CTRL32
  Top 0.406: U$81.5 104.06,49.86 106.68,47.24 JP17.7
CTRL33
  Top 0.406: U$81.6 100.97,51.69 101.6,52.32 104.14,52.32 109.22,47.24 JP17.8
CTRL34
  Top 0.406: U$86.5 124.89,49.86 127.51,47.24 JP18.7
CTRL35
  Top 0.406: U$86.6 121.79,51.69 122.43,52.32 124.97,52.32 130.05,47.24 JP18.8
CTRL36
  Top 0.406: U$91.5 20.75,65.61 23.37,62.99 JP19.7
CTRL37
  Top 0.406: U$91.6 17.65,67.44 18.29,68.07 20.83,68.07 25.91,62.99 JP19.8
CTRL38
  Top 0.406: U$96.5 41.58,65.61 44.2,62.99 JP20.7
CTRL39
  Top 0.406: U$96.6 38.48,67.44 39.12,68.07 41.66,68.07 46.74,62.99 JP20.8
CTRL40
  Top 0.406: U$101.5 62.41,65.61 65.02,62.99 JP21.7
CTRL41
  Top 0.406: U$101.6 59.31,67.44 59.94,68.07 62.48,68.07 67.56,62.99 JP21.8
CTRL42
  Top 0.406: U$106.5 83.24,65.61 85.85,62.99 JP22.7
CTRL43
  Top 0.406: U$106.6 80.14,67.44 80.77,68.07 83.31,68.07 88.39,62.99 JP22.8
CTRL44
  Top 0.406: U$111.5 104.06,65.61 106.68,62.99 JP23.7
CTRL45
  Top 0.406: U$111.6 100.97,67.44 101.6,68.07 104.14,68.07 109.22,62.99 JP23.8
CTRL46
  Top 0.406: U$116.5 124.89,65.61 127.51,62.99 JP24.7
CTRL47
  Top 0.406: U$116.6 121.79,67.44 122.43,68.07 124.97,68.07 130.05,62.99 JP24.8
CTRL48
  Top 0.406: U$121.5 20.75,81.36 23.37,78.74 JP25.7
CTRL49
  Top 0.406: U$121.6 17.65,83.19 18.29,83.82 20.83,83.82 25.91,78.74 JP25.8
CTRL50
  Top 0.406: U$126.5 41.58,81.36 44.2,78.74 JP26.7
CTRL51
  Top 0.406: U$126.6 38.48,83.19 39.12,83.82 41.66,83.82 46.74,78.74 JP26.8
CTRL52
  Top 0.406: U$131.5 62.41,81.36 65.02,78.74 JP27.7
CTRL53
  Top 0.406: U$131.6 59.31,83.19 59.94,83.82 62.48,83.82 67.56,78.74 JP27.8
CTRL54
  Top 0.406: U$136.5 83.24,81.36 85.85,78.74 JP28.7
CTRL55
  Top 0.406: U$136.6 80.14,83.19 80.77,83.82 83.31,83.82 88.39,78.74 JP28.8
CTRL56
  Top 0.406: U$141.5 104.06,81.36 106.68,78.74 JP29.7
CTRL57
  Top 0.406: U$141.6 100.97,83.19 101.6,83.82 104.14,83.82 109.22,78.74 JP29.8
CTRL58
  Top 0.406: U$146.5 124.89,81.36 127.51,78.74 JP30.7
CTRL59
  Top 0.406: U$146.6 121.79,83.19 122.43,83.82 124.97,83.82 130.05,78.74 JP30.8
CTRL60
  Top 0.406: U$151.5 20.75,97.1 23.37,94.49 JP31.7
CTRL61
  Top 0.406: U$151.6 17.65,98.93 18.29,99.57 20.83,99.57 25.91,94.49 JP31.8
CTRL62
  Top 0.406: U$156.5 41.58,97.1 44.2,94.49 JP32.7
CTRL63
  Top 0.406: U$156.6 38.48,98.93 39.12,99.57 41.66,99.57 46.74,94.49 JP32.8
CTRL64
  Top 0.406: U$161.5 62.41,97.1 65.02,94.49 JP33.7
CTRL65
  Top 0.406: U$161.6 59.31,98.93 59.94,99.57 62.48,99.57 67.56,94.49 JP33.8
CTRL66
  Top 0.406: U$166.5 83.24,97.1 85.85,94.49 JP34.7
CTRL67
  Top 0.406: U$166.6 80.14,98.93 80.77,99.57 83.31,99.57 88.39,94.49 JP34.8
CTRL68
  Top 0.406: U$171.5 104.06,97.1 106.68,94.49 JP35.7
CTRL69
  Top 0.406: U$171.6 100.97,98.93 101.6,99.57 104.14,99.57 109.22,94.49 JP35.8
CTRL70
  Top 0.406: U$176.5 124.89,97.1 127.51,94.49 JP36.7
CTRL71
  Top 0.406: U$176.6 121.79,98.93 122.43,99.57 124.97,99.57 130.05,94.49 JP36.8
GND
  Top 0.254: 20.45,10.54 20.41,10.58 C1.2 | JP1.6 20.83,8
  Top 0.406: 20.45,10.54 20.45,11.94 19.43,12.95 18.92,12.95 U$1.4 | C1.2 20.41,8.42 20.83,8
GND1
  Top 0.254: 41.27,10.54 41.24,10.58 C2.2 | JP2.6 41.66,8
  Top 0.406: 41.27,10.54 41.27,11.94 40.26,12.95 39.75,12.95 U$6.4 | C2.2 41.24,8.42 41.66,8
GND2
  Top 0.254: 62.1,10.54 62.06,10.58 C3.2 | JP3.6 62.48,8
  Top 0.406: 62.1,10.54 62.1,11.94 61.09,12.95 60.58,12.95 U$11.4 | C3.2 62.06,8.42 62.48,8
GND3
  Top 0.254: 82.93,10.54 82.89,10.58 C4.2 | JP4.6 83.31,8
  Top 0.406: 82.93,10.54 82.93,11.94 81.92,12.95 81.41,12.95 U$16.4 | C4.2 82.89,8.42 83.31,8
GND4
  Top 0.254: 103.76,10.54 103.72,10.58 C5.2 | JP5.6 104.14,8
  Top 0.406: 103.76,10.54 103.76,11.94 102.74,12.95 102.23,12.95 U$21.4 | C5.2 103.72,8.42 104.14,8
GND5
  Top 0.254: 124.59,10.54 124.55,10.58 C6.2 | JP6.6 124.97,8
  Top 0.406: 124.59,10.54 124.59,11.94 123.57,12.95 123.06,12.95 U$26.4 | C6.2 124.55,8.42 124.97,8
GND6
  Top 0.254: 20.45,26.29 20.41,26.33 C7.2 | JP7.6 20.83,23.75
  Top 0.406: 20.45,26.29 20.45,27.69 19.43,28.7 18.92,28.7 U$31.4 | C7.2 20.41,24.17 20.83,23.75
GND7
  Top 0.254: 41.27,26.29 41.24,26.33 C8.2 | JP8.6 41.66,23.75
  Top 0.406: 41.27,26.29 41.27,27.69 40.26,28.7 39.75,28.7 U$36.4 | C8.2 41.24,24.17 41.66,23.75
GND8
  Top 0.254: 62.1,26.29 62.06,26.33 C9.2 | JP9.6 62.48,23.75
  Top 0.406: 62.1,26.29 62.1,27.69 61.09,28.7 60.58,28.7 U$41.4 | C9.2 62.06,24.17 62.48,23.75
GND9
  Top 0.254: 82.93,26.29 82.89,26.33 C10.2 | JP10.6 83.31,23.75
  Top 0.406: 82.93,26.29 82.93,27.69 81.92,28.7 81.41,28.7 U$46.4 | C10.2 82.89,24.17 83.31,23.75
GND10
  Top 0.254: 103.76,26.29 103.72,26.33 C11.2 | JP11.6 104.14,23.75
  Top 0.406: 103.76,26.29 103.76,27.69 102.74,28.7 102.23,28.7 U$51.4 | C11.2 103.72,24.17 104.14,23.75
GND11
  Top 0.254: 124.59,26.29 124.55,26.33 C12.2 | JP12.6 124.97,23.75
  Top 0.406: 124.59,26.29 124.59,27.69 123.57,28.7 123.06,28.7 U$56.4 | C12.2 124.55,24.17 124.97,23.75
GND12
  Top 0.254: 20.45,42.04 20.41,42.08 C13.2 | JP13.6 20.83,39.5
  Top 0.406: 20.45,42.04 20.45,43.43 19.43,44.45 18.92,44.45 U$61.4 | C13.2 20.41,39.92 20.83,39.5
GND13
  Top 0.254: 41.27,42.04 41.24,42.08 C14.2 | JP14.6 41.66,39.5
  Top 0.406: 41.27,42.04 41.27,43.43 40.26,44.45 39.75,44.45 U$66.4 | C14.2 41.24,39.92 41.66,39.5
GND14
  Top 0.254: 62.1,42.04 62.06,42.08 C15.2 | JP15.6 62.48,39.5
  Top 0.406: 62.1,42.04 62.1,43.43 61.09,44.45 60.58,44.45 U$71.4 | C15.2 62.06,39.92 62.48,39.5
GND15
  Top 0.254: 82.93,42.04 82.89,42.08 C16.2 | JP16.6 83.31,39.5
  Top 0.406: 82.93,42.04 82.93,43.43 81.92,44.45 81.41,44.45 U$76.4 | C16.2 82.89,39.92 83.31,39.5
GND16
  Top 0.254: 103.76,42.04 103.72,42.08 C17.2 | JP17.6 104.14,39.5
  Top 0.406: 103.76,42.04 103.76,43.43 102.74,44.45 102.23,44.45 U$81.4 | C17.2 103.72,39.92 104.14,39.5
GND17
  Top 0.254: 124.59,42.04 124.55,42.08 C18.2 | JP18.6 124.97,39.5
  Top 0.406: 124.59,42.04 124.59,43.43 123.57,44.45 123.06,44.45 U$86.4 | C18.2 124.55,39.92 124.97,39.5
GND18
  Top 0.254: 20.45,57.78 20.41,57.82 C19.2 | JP19.6 20.83,55.24
  Top 0.406: 20.45,57.78 20.45,59.18 19.43,60.2 18.92,60.2 U$91.4 | C19.2 20.41,55.66 20.83,55.24
GND19
  Top 0.254: 41.27,57.78 41.24,57.82 C20.2 | JP20.6 41.66,55.24
  Top 0.406: 41.27,57.78 41.27,59.18 40.26,60.2 39.75,60.2 U$96.4 | C20.2 41.24,55.66 41.66,55.24
GND20
  Top 0.254: 62.1,57.78 62.06,57.82 C21.2 | JP21.6 62.48,55.24
  Top 0.406: 62.1,57.78 62.1,59.18 61.09,60.2 60.58,60.2 U$101.4 | C21.2 62.06,55.66 62.48,55.24
GND21
  Top 0.254: 82.93,57.78 82.89,57.82 C22.2 | JP22.6 83.31,55.24
  Top 0.406: 82.93,57.78 82.93,59.18 81.92,60.2 81.41,60.2 U$106.4 | C22.2 82.89,55.66 83.31,55.24
GND22
  Top 0.254: 103.76,57.78 103.72,57.82 C23.2 | JP23.6 104.14,55.24
  Top 0.406: 103.76,57.78 103.76,59.18 102.74,60.2 102.23,60.2 U$111.4 | C23.2 103.72,55.66 104.14,55.24
GND23
  Top 0.254: 124.59,57.78 124.55,57.82 C24.2 | JP24.6 124.97,55.24
  Top 0.406: 124.59,57.78 124.59,59.18 123.57,60.2 123.06,60.2 U$116.4 | C24.2 124.55,55.66 124.97,55.24
GND24
  Top 0.254: 20.45,73.53 20.41,73.57 C25.2 | JP25.6 20.83,70.99
  Top 0.406: 20.45,73.53 20.45,74.93 19.43,75.95 18.92,75.95 U$121.4 | C25.2 20.41,71.41 20.83,70.99
GND25
  Top 0.254: 41.27,73.53 41.24,73.57 C26.2 | JP26.6 41.66,70.99
  Top 0.406: 41.27,73.53 41.27,74.93 40.26,75.95 39.75,75.95 U$126.4 | C26.2 41.24,71.41 41.66,70.99
GND26
  Top 0.254: 62.1,73.53 62.06,73.57 C27.2 | JP27.6 62.48,70.99
  Top 0.406: 62.1,73.53 62.1,74.93 61.09,75.95 60.58,75.95 U$131.4 | C27.2 62.06,71.41 62.48,70.99
GND27
  Top 0.254: 82.93,73.53 82.89,73.57 C28.2 | JP28.6 83.31,70.99
  Top 0.406: 82.93,73.53 82.93,74.93 81.92,75.95 81.41,75.95 U$136.4 | C28.2 82.89,71.41 83.31,70.99
GND28
  Top 0.254: 103.76,73.53 103.72,73.57 C29.2 | JP29.6 104.14,70.99
  Top 0.406: 103.76,73.53 103.76,74.93 102.74,75.95 102.23,75.95 U$141.4 | C29.2 103.72,71.41 104.14,70.99
GND29
  Top 0.254: 124.59,73.53 124.55,73.57 C30.2 | JP30.6 124.97,70.99
  Top 0.406: 124.59,73.53 124.59,74.93 123.57,75.95 123.06,75.95 U$146.4 | C30.2 124.55,71.41 124.97,70.99
GND30
  Top 0.254: 20.45,89.28 20.41,89.32 C31.2 | JP31.6 20.83,86.74
  Top 0.406: 20.45,89.28 20.45,90.68 19.43,91.69 18.92,91.69 U$151.4 | C31.2 20.41,87.16 20.83,86.74
GND31
  Top 0.254: 41.27,89.28 41.24,89.32 C32.2 | JP32.6 41.66,86.74
  Top 0.406: 41.27,89.28 41.27,90.68 40.26,91.69 39.75,91.69 U$156.4 | C32.2 41.24,87.16 41.66,86.74
GND32
  Top 0.254: 62.1,89.28 62.06,89.32 C33.2 | JP33.6 62.48,86.74
  Top 0.406: 62.1,89.28 62.1,90.68 61.09,91.69 60.58,91.69 U$161.4 | C33.2 62.06,87.16 62.48,86.74
GND33
  Top 0.254: 82.93,89.28 82.89,89.32 C34.2 | JP34.6 83.31,86.74
  Top 0.406: 82.93,89.28 82.93,90.68 81.92,91.69 81.41,91.69 U$166.4 | C34.2 82.89,87.16 83.31,86.74
GND34
  Top 0.254: 103.76,89.28 103.72,89.32 C35.2 | JP35.6 104.14,86.74
  Top 0.406: 103.76,89.28 103.76,90.68 102.74,91.69 102.23,91.69 U$171.4 | C35.2 103.72,87.16 104.14,86.74
GND35
  Top 0.254: 124.59,89.28 124.55,89.32 C36.2 | JP36.6 124.97,86.74
  Top 0.406: 124.59,89.28 124.59,90.68 123.57,91.69 123.06,91.69 U$176.4 | C36.2 124.55,87.16 124.97,86.74
OUT1
  Top 0.406: U$1.1 15.11,10.03 JP1.3
OUT2
  Top 0.406: U$1.2 16.38,8.76 JP1.4
OUT3
  Top 0.406: U$6.1 35.94,10.03 JP2.3
OUT4
  Top 0.406: U$6.2 37.21,8.76 JP2.4
OUT5
  Top 0.406: U$11.1 56.77,10.03 JP3.3
OUT6
  Top 0.406: U$11.2 58.04,8.76 JP3.4
OUT7
  Top 0.406: U$16.1 77.6,10.03 JP4.3
OUT8
  Top 0.406: U$16.2 78.87,8.76 JP4.4
OUT9
  Top 0.406: U$21.1 98.42,10.03 JP5.3
OUT10
  Top 0.406: U$21.2 99.69,8.76 JP5.4
OUT11
  Top 0.406: U$26.1 119.25,10.03 JP6.3
OUT12
  Top 0.406: U$26.2 120.52,8.76 JP6.4
OUT13
  Top 0.406: U$31.1 15.11,25.78 JP7.3
OUT14
  Top 0.406: U$31.2 16.38,24.51 JP7.4
OUT15
  Top 0.406: U$36.1 35.94,25.78 JP8.3
OUT16
  Top 0.406: U$36.2 37.21,24.51 JP8.4
OUT17
  Top 0.406: U$41.1 56.77,25.78 JP9.3
OUT18
  Top 0.406: U$41.2 58.04,24.51 JP9.4
OUT19
  Top 0.406: U$46.1 77.6,25.78 JP10.3
OUT20
  Top 0.406: U$46.2 78.87,24.51 JP10.4
OUT21
  Top 0.406: U$51.1 98.42,25.78 JP11.3
OUT22
  Top 0.406: U$51.2 99.69,24.51 JP11.4
OUT23
  Top 0.406: U$56.1 119.25,25.78 JP12.3
OUT24
  Top 0.406: U$56.2 120.52,24.51 JP12.4
OUT25
  Top 0.406: U$61.1 15.11,41.53 JP13.3
OUT26
  Top 0.406: U$61.2 16.38,40.26 JP13.4
OUT27
  Top 0.406: U$66.1 35.94,41.53 JP14.3
OUT28
  Top 0.406: U$66.2 37.21,40.26 JP14.4
OUT29
  Top 0.406: U$71.1 56.77,41.53 JP15.3
OUT30
  Top 0.406: U$71.2 58.04,40.26 JP15.4
OUT31
  Top 0.406: U$76.1 77.6,41.53 JP16.3
OUT32
  Top 0.406: U$76.2 78.87,40.26 JP16.4
OUT33
  Top 0.406: U$81.1 98.42,41.53 JP17.3
OUT34
  Top 0.406: U$81.2 99.69,40.26 JP17.4
OUT35
  Top 0.406: U$86.1 119.25,41.53 JP18.3
OUT36
  Top 0.406: U$86.2 120.52,40.26 JP18.4
OUT37
  Top 0.406: U$91.1 15.11,57.28 JP19.3
OUT38
  Top 0.406: U$91.2 16.38,56.01 JP19.4
OUT39
  Top 0.406: U$96.1 35.94,57.28 JP20.3
OUT40
  Top 0.406: U$96.2 37.21,56.01 JP20.4
OUT41
  Top 0.406: U$101.1 56.77,57.28 JP21.3
OUT42
  Top 0.406: U$101.2 58.04,56.01 JP21.4
OUT43
  Top 0.406: U$106.1 77.6,57.28 JP22.3
OUT44
  Top 0.406: U$106.2 78.87,56.01 JP22.4
OUT45
  Top 0.406: U$111.1 98.42,57.28 JP23.3
OUT46
  Top 0.406: U$111.2 99.69,56.01 JP23.4
OUT47
  Top 0.406: U$116.1 119.25,57.28 JP24.3
OUT48
  Top 0.406: U$116.2 120.52,56.01 JP24.4
OUT49
  Top 0.406: U$121.1 15.11,73.03 JP25.3
OUT50
  Top 0.406: U$121.2 16.38,71.75 JP25.4
OUT51
  Top 0.406: U$126.1 35.94,73.03 JP26.3
OUT52
  Top 0.406: U$126.2 37.21,71.75 JP26.4
OUT53
  Top 0.406: U$131.1 56.77,73.03 JP27.3
OUT54
  Top 0.406: U$131.2 58.04,71.75 JP27.4
OUT55
  Top 0.406: U$136.1 77.6,73.03 JP28.3
OUT56
  Top 0.406: U$136.2 78.87,71.75 JP28.4
OUT57
  Top 0.406: U$141.1 98.42,73.03 JP29.3
OUT58
  Top 0.406: U$141.2 99.69,71.75 JP29.4
OUT59
  Top 0.406: U$146.1 119.25,73.03 JP30.3
OUT60
  Top 0.406: U$146.2 120.52,71.75 JP30.4
OUT61
  Top 0.406: U$151.1 15.11,88.77 JP31.3
OUT62
  Top 0.406: U$151.2 16.38,87.5 JP31.4
OUT63
  Top 0.406: U$156.1 35.94,88.77 JP32.3
OUT64
  Top 0.406: U$156.2 37.21,87.5 JP32.4
OUT65
  Top 0.406: U$161.1 56.77,88.77 JP33.3
OUT66
  Top 0.406: U$161.2 58.04,87.5 JP33.4
OUT67
  Top 0.406: U$166.1 77.6,88.77 JP34.3
OUT68
  Top 0.406: U$166.2 78.87,87.5 JP34.4
OUT69
  Top 0.406: U$171.1 98.42,88.77 JP35.3
OUT70
  Top 0.406: U$171.2 99.69,87.5 JP35.4
OUT71
  Top 0.406: U$176.1 119.25,88.77 JP36.3
OUT72
  Top 0.406: U$176.2 120.52,87.5 JP36.4
SCL
  Top 0.406: U$1.8 13.28,18.36 10.67,15.75 JP1.2
SCL1
  Top 0.406: U$6.8 34.11,18.36 31.5,15.75 JP2.2
SCL2
  Top 0.406: U$11.8 54.94,18.36 52.32,15.75 JP3.2
SCL3
  Top 0.406: U$16.8 75.77,18.36 73.15,15.75 JP4.2
SCL4
  Top 0.406: U$21.8 96.6,18.36 93.98,15.75 JP5.2
SCL5
  Top 0.406: U$26.8 117.42,18.36 114.81,15.75 JP6.2
SCL6
  Top 0.406: U$31.8 13.28,34.11 10.67,31.5 JP7.2
SCL7
  Top 0.406: U$36.8 34.11,34.11 31.5,31.5 JP8.2
SCL8
  Top 0.406: U$41.8 54.94,34.11 52.32,31.5 JP9.2
SCL9
  Top 0.406: U$46.8 75.77,34.11 73.15,31.5 JP10.2
SCL10
  Top 0.406: U$51.8 96.6,34.11 93.98,31.5 JP11.2
SCL11
  Top 0.406: U$56.8 117.42,34.11 114.81,31.5 JP12.2
SCL12
  Top 0.406: U$61.8 13.28,49.86 10.67,47.24 JP13.2
SCL13
  Top 0.406: U$66.8 34.11,49.86 31.5,47.24 JP14.2
SCL14
  Top 0.406: U$71.8 54.94,49.86 52.32,47.24 JP15.2
SCL15
  Top 0.406: U$76.8 75.77,49.86 73.15,47.24 JP16.2
SCL16
  Top 0.406: U$81.8 96.6,49.86 93.98,47.24 JP17.2
SCL17
  Top 0.406: U$86.8 117.42,49.86 114.81,47.24 JP18.2
SCL18
  Top 0.406: U$91.8 13.28,65.61 10.67,62.99 JP19.2
SCL19
  Top 0.406: U$96.8 34.11,65.61 31.5,62.99 JP20.2
SCL20
  Top 0.406: U$101.8 54.94,65.61 52.32,62.99 JP21.2
SCL21
  Top 0.406: U$106.8 75.77,65.61 73.15,62.99 JP22.2
SCL22
  Top 0.406: U$111.8 96.6,65.61 93.98,62.99 JP23.2
SCL23
  Top 0.406: U$116.8 117.42,65.61 114.81,62.99 JP24.2
SCL24
  Top 0.406: U$121.8 13.28,81.36 10.67,78.74 JP25.2
SCL25
  Top 0.406: U$126.8 34.11,81.36 31.5,78.74 JP26.2
SCL26
  Top 0.406: U$131.8 54.94,81.36 52.32,78.74 JP27.2
SCL27
  Top 0.406: U$136.8 75.77,81.36 73.15,78.74 JP28.2
SCL28
  Top 0.406: U$141.8 96.6,81.36 93.98,78.74 JP29.2
SCL29
  Top 0.406: U$146.8 117.42,81.36 114.81,78.74 JP30.2
SCL30
  Top 0.406: U$151.8 13.28,97.1 10.67,94.49 JP31.2
SCL31
  Top 0.406: U$156.8 34.11,97.1 31.5,94.49 JP32.2
SCL32
  Top 0.406: U$161.8 54.94,97.1 52.32,94.49 JP33.2
SCL33
  Top 0.406: U$166.8 75.77,97.1 73.15,94.49 JP34.2
SCL34
  Top 0.406: U$171.8 96.6,97.1 93.98,94.49 JP35.2
SCL35
  Top 0.406: U$176.8 117.42,97.1 114.81,94.49 JP36.2
SDA
  Top 0.406: U$1.7 16.38,20.19 15.75,20.83 13.21,20.83 8.13,15.75 JP1.1
SDA1
  Top 0.406: U$6.7 37.21,20.19 36.58,20.83 34.04,20.83 28.96,15.75 JP2.1
SDA2
  Top 0.406: U$11.7 58.04,20.19 57.4,20.83 54.86,20.83 49.78,15.75 JP3.1
SDA3
  Top 0.406: U$16.7 78.87,20.19 78.23,20.83 75.69,20.83 70.61,15.75 JP4.1
SDA4
  Top 0.406: U$21.7 99.69,20.19 99.06,20.83 96.52,20.83 91.44,15.75 JP5.1
SDA5
  Top 0.406: U$26.7 120.52,20.19 119.89,20.83 117.35,20.83 112.27,15.75 JP6.1
SDA6
  Top 0.406: U$31.7 16.38,35.94 15.75,36.58 13.21,36.58 8.13,31.5 JP7.1
SDA7
  Top 0.406: U$36.7 37.21,35.94 36.58,36.58 34.04,36.58 28.96,31.5 JP8.1
SDA8
  Top 0.406: U$41.7 58.04,35.94 57.4,36.58 54.86,36.58 49.78,31.5 JP9.1
SDA9
  Top 0.406: U$46.7 78.87,35.94 78.23,36.58 75.69,36.58 70.61,31.5 JP10.1
SDA10
  Top 0.406: U$51.7 99.69,35.94 99.06,36.58 96.52,36.58 91.44,31.5 JP11.1
SDA11
  Top 0.406: U$56.7 120.52,35.94 119.89,36.58 117.35,36.58 112.27,31.5 JP12.1
SDA12
  Top 0.406: U$61.7 16.38,51.69 15.75,52.32 13.21,52.32 8.13,47.24 JP13.1
SDA13
  Top 0.406: U$66.7 37.21,51.69 36.58,52.32 34.04,52.32 28.96,47.24 JP14.1
SDA14
  Top 0.406: U$71.7 58.04,51.69 57.4,52.32 54.86,52.32 49.78,47.24 JP15.1
SDA15
  Top 0.406: U$76.7 78.87,51.69 78.23,52.32 75.69,52.32 70.61,47.24 JP16.1
SDA16
  Top 0.406: U$81.7 99.69,51.69 99.06,52.32 96.52,52.32 91.44,47.24 JP17.1
SDA17
  Top 0.406: U$86.7 120.52,51.69 119.89,52.32 117.35,52.32 112.27,47.24 JP18.1
SDA18
  Top 0.406: U$91.7 16.38,67.44 15.75,68.07 13.21,68.07 8.13,62.99 JP19.1
SDA19
  Top 0.406: U$96.7 37.21,67.44 36.58,68.07 34.04,68.07 28.96,62.99 JP20.1
SDA20
  Top 0.406: U$101.7 58.04,67.44 57.4,68.07 54.86,68.07 49.78,62.99 JP21.1
SDA21
  Top 0.406: U$106.7 78.87,67.44 78.23,68.07 75.69,68.07 70.61,62.99 JP22.1
SDA22
  Top 0.406: U$111.7 99.69,67.44 99.06,68.07 96.52,68.07 91.44,62.99 JP23.1
SDA23
  Top 0.406: U$116.7 120.52,67.44 119.89,68.07 117.35,68.07 112.27,62.99 JP24.1
SDA24
  Top 0.406: U$121.7 16.38,83.19 15.75,83.82 13.21,83.82 8.13,78.74 JP25.1
SDA25
  Top 0.406: U$126.7 37.21,83.19 36.58,83.82 34.04,83.82 28.96,78.74 JP26.1
SDA26
  Top 0.406: U$131.7 58.04,83.19 57.4,83.82 54.86,83.82 49.78,78.74 JP27.1
SDA27
  Top 0.406: U$136.7 78.87,83.19 78.23,83.82 75.69,83.82 70.61,78.74 JP28.1
SDA28
  Top 0.406: U$141.7 99.69,83.19 99.06,83.82 96.52,83.82 91.44,78.74 JP29.1
SDA29
  Top 0.406: U$146.7 120.52,83.19 119.89,83.82 117.35,83.82 112.27,78.74 JP30.1
SDA30
  Top 0.406: U$151.7 16.38,98.93 15.75,99.57 13.21,99.57 8.13,94.49 JP31.1
SDA31
  Top 0.406: U$156.7 37.21,98.93 36.58,99.57 34.04,99.57 28.96,94.49 JP32.1
SDA32
  Top 0.406: U$161.7 58.04,98.93 57.4,99.57 54.86,99.57 49.78,94.49 JP33.1
SDA33
  Top 0.406: U$166.7 78.87,98.93 78.23,99.57 75.69,99.57 70.61,94.49 JP34.1
SDA34
  Top 0.406: U$171.7 99.69,98.93 99.06,99.57 96.52,99.57 91.44,94.49 JP35.1
SDA35
  Top 0.406: U$176.7 120.52,98.93 119.89,99.57 117.35,99.57 112.27,94.49 JP36.1
VCC
  Top 0.406: U$1.3 17.65,11.3 18.29,10.67 C1.1 18.71,8.55 JP1.5
VCC1
  Top 0.406: U$6.3 38.48,11.3 39.12,10.67 C2.1 39.54,8.55 JP2.5
VCC2
  Top 0.406: U$11.3 59.31,11.3 59.94,10.67 C3.1 60.36,8.55 JP3.5
VCC3
  Top 0.406: U$16.3 80.14,11.3 80.77,10.67 C4.1 81.19,8.55 JP4.5
VCC4
  Top 0.406: U$21.3 100.97,11.3 101.6,10.67 C5.1 102.02,8.55 JP5.5
VCC5
  Top 0.406: U$26.3 121.79,11.3 122.43,10.67 C6.1 122.85,8.55 JP6.5
VCC6
  Top 0.406: U$31.3 17.65,27.05 18.29,26.42 C7.1 18.71,24.3 JP7.5
VCC7
  Top 0.406: U$36.3 38.48,27.05 39.12,26.42 C8.1 39.54,24.3 JP8.5
VCC8
  Top 0.406: U$41.3 59.31,27.05 59.94,26.42 C9.1 60.36,24.3 JP9.5
VCC9
  Top 0.406: U$46.3 80.14,27.05 80.77,26.42 C10.1 81.19,24.3 JP10.5
VCC10
  Top 0.406: U$51.3 100.97,27.05 101.6,26.42 C11.1 102.02,24.3 JP11.5
VCC11
  Top 0.406: U$56.3 121.79,27.05 122.43,26.42 C12.1 122.85,24.3 JP12.5
VCC12
  Top 0.406: U$61.3 17.65,42.8 18.29,42.16 C13.1 18.71,40.04 JP13.5
VCC13
  Top 0.406: U$66.3 38.48,42.8 39.12,42.16 C14.1 39.54,40.04 JP14.5
VCC14
  Top 0.406: U$71.3 59.31,42.8 59.94,42.16 C15.1 60.36,40.04 JP15.5
VCC15
  Top 0.406: U$76.3 80.14,42.8 80.77,42.16 C16.1 81.19,40.04 JP16.5
VCC16
  Top 0.406: U$81.3 100.97,42.8 101.6,42.16 C17.1 102.02,40.04 JP17.5
VCC17
  Top 0.406: U$86.3 121.79,42.8 122.43,42.16 C18.1 122.85,40.04 JP18.5
VCC18
  Top 0.406: U$91.3 17.65,58.55 18.29,57.91 C19.1 18.71,55.79 JP19.5
VCC19
  Top 0.406: U$96.3 38.48,58.55 39.12,57.91 C20.1 39.54,55.79 JP20.5
VCC20
  Top 0.406: U$101.3 59.31,58.55 59.94,57.91 C21.1 60.36,55.79 JP21.5
VCC21
  Top 0.406: U$106.3 80.14,58.55 80.77,57.91 C22.1 81.19,55.79 JP22.5
VCC22
  Top 0.406: U$111.3 100.97,58.55 101.6,57.91 C23.1 102.02,55.79 JP23.5
VCC23
  Top 0.406: U$116.3 121.79,58.55 122.43,57.91 C24.1 122.85,55.79 JP24.5
VCC24
  Top 0.406: U$121.3 17.65,74.3 18.29,73.66 C25.1 18.71,71.54 JP25.5
VCC25
  Top 0.406: U$126.3 38.48,74.3 39.12,73.66 C26.1 39.54,71.54 JP26.5
VCC26
  Top 0.406: U$131.3 59.31,74.3 59.94,73.66 C27.1 60.36,71.54 JP27.5
VCC27
  Top 0.406: U$136.3 80.14,74.3 80.77,73.66 C28.1 81.19,71.54 JP28.5
VCC28
  Top 0.406: U$141.3 100.97,74.3 101.6,73.66 C29.1 102.02,71.54 JP29.5
VCC29
  Top 0.406: U$146.3 121.79,74.3 122.43,73.66 C30.1 122.85,71.54 JP30.5
VCC30
  Top 0.406: U$151.3 17.65,90.04 18.29,89.41 C31.1 18.71,87.29 JP31.5
VCC31
  Top 0.406: U$156.3 38.48,90.04 39.12,89.41 C32.1 39.54,87.29 JP32.5
VCC32
  Top 0.406: U$161.3 59.31,90.04 59.94,89.41 C33.1 60.36,87.29 JP33.5
VCC33
  Top 0.406: U$166.3 80.14,90.04 80.77,89.41 C34.1 81.19,87.29 JP34.5
VCC34
  Top 0.406: U$171.3 100.97,90.04 101.6,89.41 C35.1 102.02,87.29 JP35.5
VCC35
  Top 0.406: U$176.3 121.79,90.04 122.43,89.41 C36.1 122.85,87.29 JP36.5

## Text on the board
Bottom: v10 | v10 | v10 | v10 | v10 | v10 | v10 | v10 | v10 | v10 | v10 | v10 | v10 | v10 | v10 | v10 | v10 | v10 | v10 | v10 | v10 | v10 | v10 | v10 | v10 | v10 | v10 | v10 | v10 | v10 | v10 | v10 | v10 | v10 | v10 | v10
bPlace: DS1077 | DS1077 | DS1077 | DS1077 | DS1077 | DS1077 | BREAKOUT | BREAKOUT | BREAKOUT | BREAKOUT | BREAKOUT | BREAKOUT | SDA | SCL | OUT1 | OUT2 | VCC | GND | CTRL0 | CTRL1 | SDA | SCL | OUT1 | OUT2 | VCC | GND | CTRL0 | CTRL1 | SDA | SCL | OUT1 | OUT2 | VCC | GND | CTRL0 | CTRL1 | SDA | SCL | OUT1 | OUT2 | VCC | GND | CTRL0 | CTRL1 | SDA | SCL | OUT1 | OUT2 | VCC | GND | CTRL0 | CTRL1 | SDA | SCL | OUT1 | OUT2 | VCC | GND | CTRL0 | CTRL1 | DS1077 | DS1077 | DS1077 | DS1077 | DS1077 | DS1077 | BREAKOUT | BREAKOUT | BREAKOUT | BREAKOUT | BREAKOUT | BREAKOUT | SDA | SCL | OUT1 | OUT2 | VCC | GND | CTRL0 | CTRL1 | SDA | SCL | OUT1 | OUT2 | VCC | GND | CTRL0 | CTRL1 | SDA | SCL | OUT1 | OUT2 | VCC | GND | CTRL0 | CTRL1 | SDA | SCL | OUT1 | OUT2 | VCC | GND | CTRL0 | CTRL1 | SDA | SCL | OUT1 | OUT2 | VCC | GND | CTRL0 | CTRL1 | SDA | SCL | OUT1 | OUT2 | VCC | GND | CTRL0 | CTRL1 | DS1077 | DS1077 | DS1077 | DS1077 | DS1077 | DS1077 | BREAKOUT | BREAKOUT | BREAKOUT | BREAKOUT | BREAKOUT | BREAKOUT | SDA | SCL | OUT1 | OUT2 | VCC | GND | CTRL0 | CTRL1 | SDA | SCL | OUT1 | OUT2 | VCC | GND | CTRL0 | CTRL1 | SDA | SCL | OUT1 | OUT2 | VCC | GND | CTRL0 | CTRL1 | SDA | SCL | OUT1 | OUT2 | VCC | GND | CTRL0 | CTRL1 | SDA | SCL | OUT1 | OUT2 | VCC | GND | CTRL0 | CTRL1 | SDA | SCL | OUT1 | OUT2 | VCC | GND | CTRL0 | CTRL1 | DS1077 | DS1077 | DS1077 | DS1077 | DS1077 | DS1077 | BREAKOUT | BREAKOUT | BREAKOUT | BREAKOUT | BREAKOUT | BREAKOUT | SDA | SCL | OUT1 | OUT2 | VCC | GND | CTRL0 | CTRL1 | SDA | SCL | OUT1 | OUT2 | VCC | GND | CTRL0 | CTRL1 | SDA | SCL | OUT1 | OUT2 | VCC | GND | CTRL0 | CTRL1 | SDA | SCL | OUT1 | OUT2 | VCC | GND | CTRL0 | CTRL1 | SDA | SCL | OUT1 | OUT2 | VCC | GND | CTRL0 | CTRL1 | SDA | SCL | OUT1 | OUT2 | VCC | GND | CTRL0 | CTRL1 | DS1077 | DS1077 | DS1077 | DS1077 | DS1077 | DS1077 | BREAKOUT | BREAKOUT | BREAKOUT | BREAKOUT | BREAKOUT | BREAKOUT | SDA | SCL | OUT1 | OUT2 | VCC | GND | CTRL0 | CTRL1 | SDA | SCL | OUT1 | OUT2 | VCC | GND | CTRL0 | CTRL1 | SDA | SCL | OUT1 | OUT2 | VCC | GND | CTRL0 | CTRL1 | SDA | SCL | OUT1 | OUT2 | VCC | GND | CTRL0 | CTRL1 | SDA | SCL | OUT1 | OUT2 | VCC | GND | CTRL0 | CTRL1 | SDA | SCL | OUT1 | OUT2 | VCC | GND | CTRL0 | CTRL1 | DS1077 | DS1077 | DS1077 | DS1077 | DS1077 | DS1077 | BREAKOUT | BREAKOUT | BREAKOUT | BREAKOUT | BREAKOUT | BREAKOUT | SDA | SCL | OUT1 | OUT2 | VCC | GND | CTRL0 | CTRL1 | SDA | SCL | OUT1 | OUT2 | VCC | GND | CTRL0 | CTRL1 | SDA | SCL | OUT1 | OUT2 | VCC | GND | CTRL0 | CTRL1 | SDA | SCL | OUT1 | OUT2 | VCC | GND | CTRL0 | CTRL1 | SDA | SCL | OUT1 | OUT2 | VCC | GND | CTRL0 | CTRL1 | SDA | SCL | OUT1 | OUT2 | VCC | GND | CTRL0 | CTRL1